# Altium PCB PowerSupplyV2.PcbDoc (part 1 of 4)
Units mm, origin at the board's own origin, x right, y up, seen from the top; angles counter-clockwise.
Board outline 28.17 x 37.01 mm, 2 copper layers (Top Layer, Bottom Layer), stack 0.971 mm thick; 117 components, 81 nets, 421 pads, 118 vias.
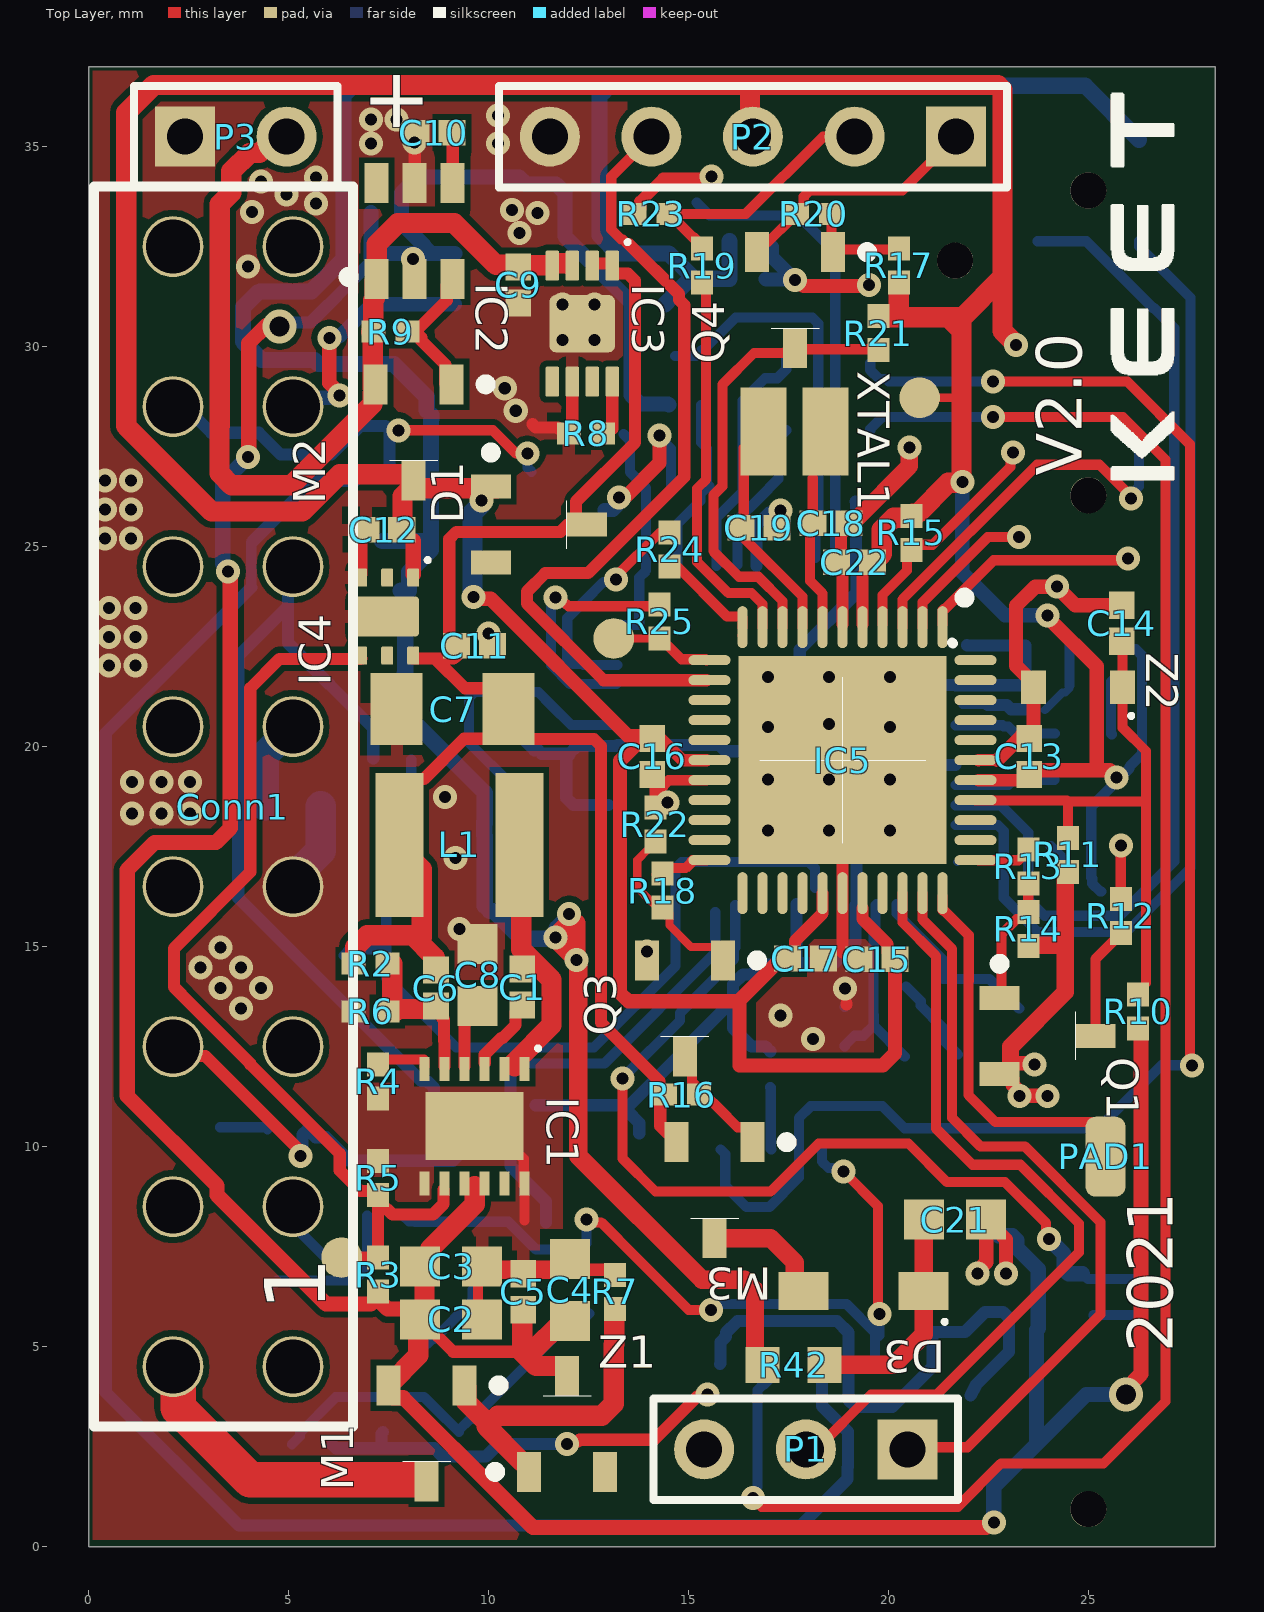
[diagram p0: Top Layer view]
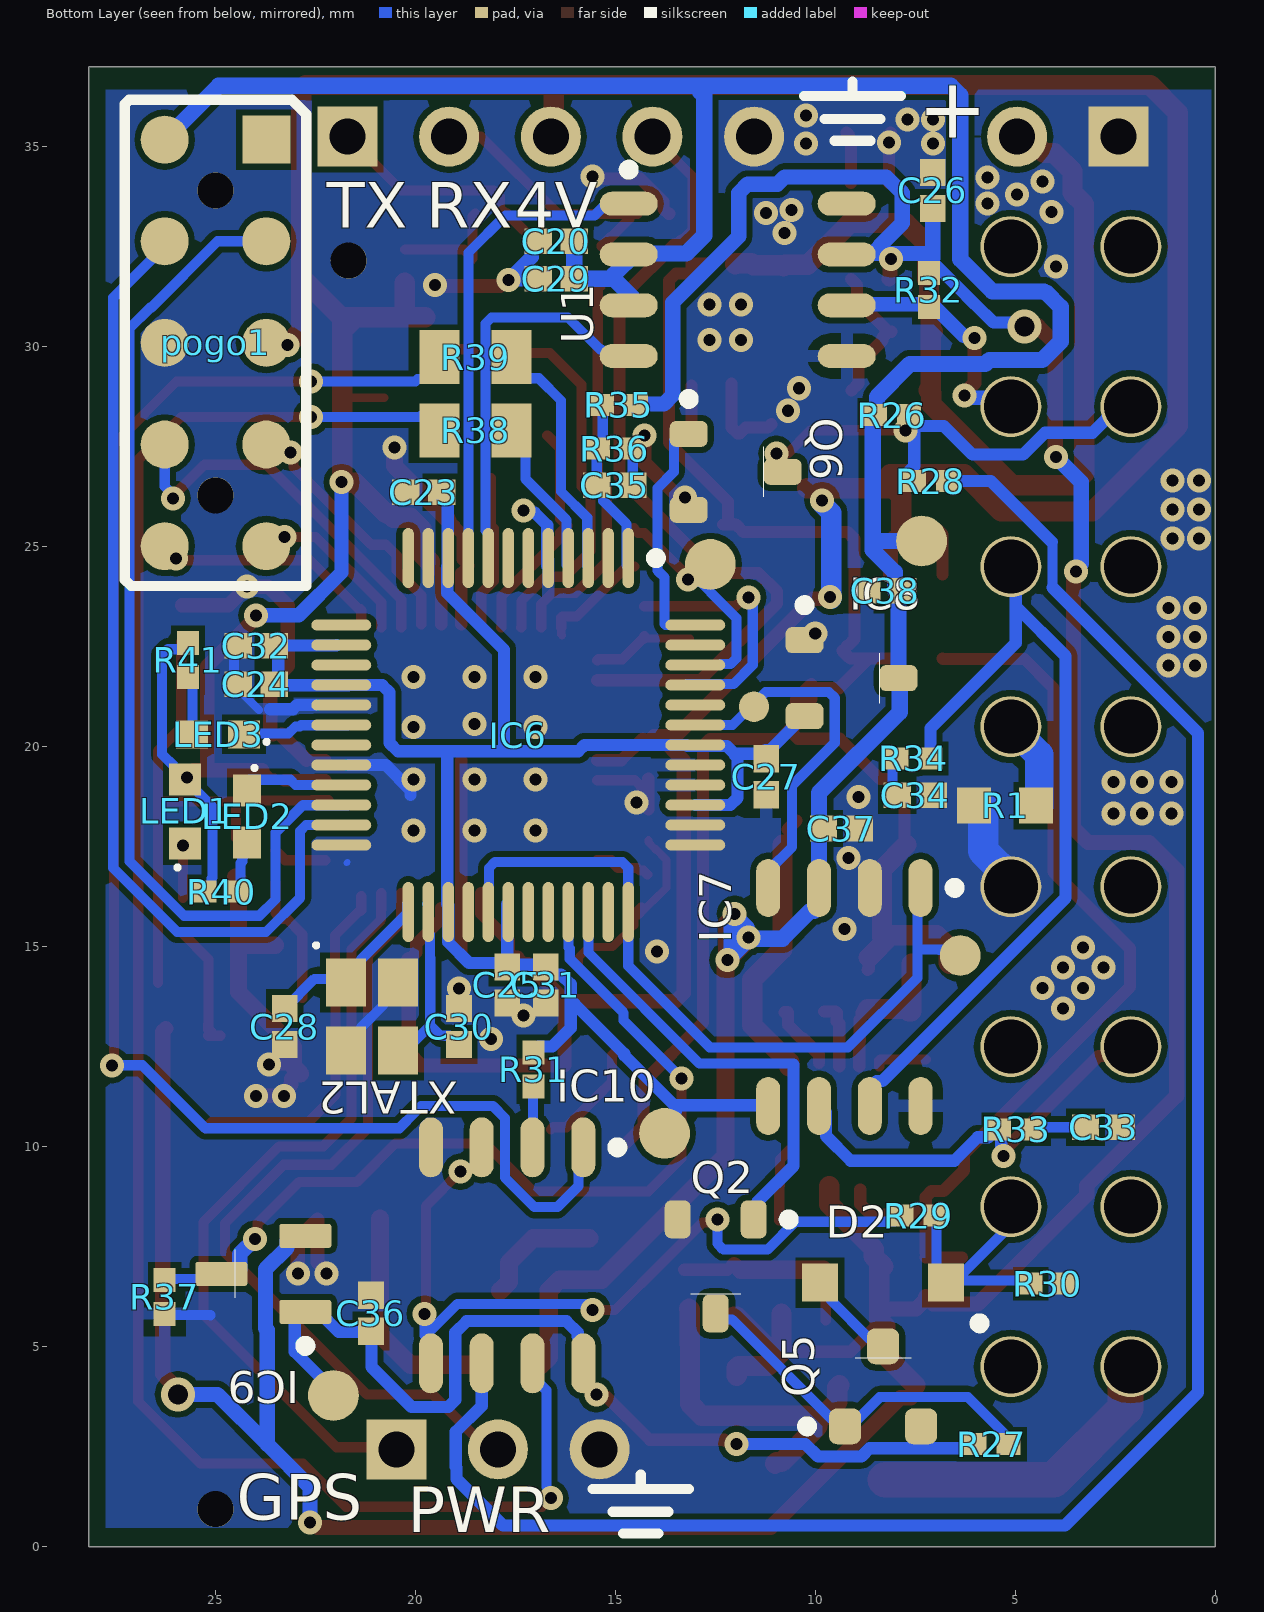
[diagram p1: Bottom Layer view, seen from below]

## Layer stack, top to bottom
Top Solder: solder mask 0.0102, Solder Resist, Dk 3.5
Top Layer: signal copper 0.0356
Dielectric 1: dielectric 0.9, FR-4, Dk 4.8
Bottom Layer: signal copper 0.0356
Bottom Solder: solder mask 0.0102, Solder Resist, Dk 3.5

## Board outline
0,0 28.169,0 28.169,37.008 0,37.008

## Design rules (kind name [scope] priority, off if disabled: settings)
Clearance [All] p1: gap=0.152 ignorepadtopadclearanceinfootprint=FALSE
PolygonConnect [All] p1: connectstyle=Relief reliefconductorwidth=0.305 reliefentries=4 polygonreliefangle="90 Angle" airgapwidth=0.254
RoomDefinition OBD [InComponentClass('OBD')] p1 off: confinementstyle=ConfineIn formatcopy=TRUE lockcomponents=FALSE outline 33.116,39.7 110.916,39.7 110.916,21.463 33.116,21.463
RoomDefinition Control [InComponentClass('Control')] p2 off: confinementstyle=ConfineIn formatcopy=TRUE lockcomponents=FALSE outline 31.242,1.397 62.255,1.397 62.255,12.573 31.242,12.573
RoomDefinition PowerSupply [InComponentClass('PowerSupply')] p3 off: confinementstyle=ConfineIn formatcopy=TRUE lockcomponents=FALSE outline 40.936,-25.4 190.161,-25.4 190.161,76.073 40.936,76.073
RoutingVias [All] p1: holewidth=0.3 width=0.6 viastyle="Through Hole" minholewidth=0.3 minwidth=0.6 maxholewidth=0.711 maxwidth=1.27
SolderMaskExpansion [All] p1: expansion=0.102 istentingtop=FALSE
Width [All] p1: maxlimit=1 minlimit=0.152 preferedwidth=0.254
30 further rules are at their usual default settings.

## Classes and differential pairs
component class OBD: C20 C23 C24 C25 C26 C27 C28 C29 C30 C31 C32 C33 C34 C35 C36 C37 C38 D2 IC6 IC7 IC8 IC9 IC10 LED2 LED3 pogo1 Q2 Q5 Q6 R26 R27 R28 R29 R30 R31 R32 R33 R34 R35 R36 R37 R38 R39 R40 R41 U1 U2 XTAL2
component class Control: C13 C14 C15 C16 C17 C18 C19 C21 C22 D3 IC5 LED1 M3 PAD1 Q1 Q3 Q4 R10 R11 R12 R13 R14 R15 R16 R17 R18 R19 R20 R21 R22 R23 R24 R25 R42 XTAL1 Z2
component class PowerSupply: C1 C2 C3 C4 C5 C6 C7 C8 C9 C10 C11 C12 Conn1 D1 IC1 IC2 IC3 IC4 L1 M1 M2 P1 P2 P3 R1 R2 R3 R4 R5 R6 R7 R8 R9 Z1

## Components (designator, comment, footprint, x,y, rotation, side; value= is the part's Value field where it differs from the comment)
C1 "100n" CAPC1005X06N 10.846,13.995 r90 top
C2 "4.7u" CAPC1608X10N 9.068,5.69 r180 top
C3 "4.7u" CAPC1608X10N 9.068,7.01 r0 top
C4 "4.7u" CAPC1608X10N 12.031,6.426 r270 top
C5 "100n" CAPC1005X06N 10.871,6.375 r270 top
C6 "51p" CAPC1005X06N 8.687,13.97 r90 top
C7 "47u" CAPC3216X12N 9.102,20.941 r0 top
C8 "2.2u" CAPC1608X10N 9.728,14.3 r270 top
C9 "4.7u" CAPC1005X06N 10.744,31.547 r90 top
C10 "4.7n" CAPC1005X06N 8.636,35.357 r0 top
C11 "1u" CAPC1005X06N 9.652,22.53 r0 top
C12 "2.2u" CAPC1005X06N 7.381,25.425 r180 top
C13 "1u" CAPC1005X06N 23.52,19.761 r90 top
C14 "1u" CAPC1005X06N 25.832,23.089 r90 top
C15 "1u" CAPC1005X06N 19.711,14.693 r180 top
C16 "1u" CAPC1005X06N 14.097,19.761 r90 top
C17 "1u" CAPC1005X06N 17.925,14.708 r0 top
C18 "8p" CAPC1005X06N 18.565,25.593 r180 top
C19 "8p" CAPC1005X06N 16.762,25.473 r180 top
C20 "100n" CAPC1005X06N 16.477,32.639 r180 bottom
C21 "10u" CAPC1608X10N 21.666,8.179 r180 top
C22 "1u" CAPC1005X06N 19.152,24.613 r0 top
C23 "1u" CAPC1005X06N 19.787,26.365 r0 bottom
C24 "1u" CAPC1005X06N 23.978,21.565 r0 bottom
C25 "1u" CAPC1005X06N 17.704,14.046 r270 bottom
C26 "100n" CAPC1005X06N 7.061,33.909 r270 bottom
C27 "1u" CAPC1005X06N 11.227,19.253 r270 bottom
C28 "10p" CAPC1005X06N 23.266,13.005 r90 bottom
C29 "10u" CAPC1005X06N 16.477,31.699 r180 bottom
C30 "10p" CAPC1005X06N 18.907,13.005 r270 bottom
C31 "1u" CAPC1005X06N 16.739,14.046 r270 bottom
C32 "1u" CAPC1005X06N 23.978,22.53 r180 bottom
C33 "560p" CAPC1005X06N 2.794,10.49 r180 bottom
C34 "560p" CAPC1005X06N 7.501,18.786 r180 bottom
C35 "100n" CAPC1005X06N 15.011,26.543 r0 bottom
C36 "100n" CAPC1005X06N 21.107,5.842 r270 bottom
C37 "100n" CAPC1005X06N 9.347,17.958 r0 bottom
C38 "1u" CAPC1005X06N 8.255,23.901 r0 bottom
Conn1 "OBD2 connector" OBD2 2.112,4.506 r90 top locked
D1 "schottky 0.35V @10mA" SOT95P245X110-3N 11.257,25.558 r0 top
D2 "Schottky" TSSOP0P370X135-2N 8.306,6.604 r0 bottom
D3 "02SSL20L" SODFL370X100-2N 19.38,6.401 r180 top
IC1 "DC/DC" SON50P300X80_HS-13N 9.652,10.516 r270 top
IC2 "S-1011EA0-M6T1U4" SOT95P245X110-6N 8.153,32.893 r90 top
IC3 "battery manager" PSON50P300X100_HS-9N 12.344,30.579 r270 top
IC4 "LDO SON-PKG" SON65P200X80_HS-7N 7.468,23.258 r270 top
IC5 "atmega 1284p-mu" QFN50P700X700X100_HS-45N 18.85,19.666 r270 top locked
IC6 "ARM" TSQFP50P898X898X160-48N 17.424,20.295 r270 bottom locked
IC7 "CAN driver" SOP127P600X175-8N 9.271,13.749 r270 bottom
IC8 "LDO 3.3V" SOT95P240X135-3N 9.093,21.717 r180 bottom
IC9 "5V" SOT95P237X111-3N-ver2 23.799,6.824 r0 bottom
IC10 "Comparator" SOIC127P600X175-8N 17.704,7.288 r270 bottom
L1 "4.7u" INDC4040X19N 9.271,17.551 r180 top
LED1 "red" CAC-0P80X160-2N 25.756,18.39 r90 bottom locked
LED2 "red" CAC-0P80X160-2N_ver2 24.206,18.262 r270 bottom
LED3 "Yellow" CAC-0P80X160-2N_ver2 24.93,20.314 r0 bottom
M1 "Pmos enhancement" SOT95P245X110-3N 8.451,2.837 r270 top
M2 "Pmos" SOT95P245X110-3N 8.129,27.864 r270 top
M3 "Pmos" SOT95P245X110-3N 15.654,8.916 r270 top
P1 "Header 3" HDR1X3 20.472,2.438 r180 top locked
P2 "Header 5" HDR1X5 21.692,35.255 r180 top locked
P3 "Header 2" HDR1X2 2.413,35.255 r0 top
PAD1 "DEBTX" PAD 25.425,9.754 r90 top
pogo1 "POGO-connector3x4" POGO_connector_3x4 23.724,35.179 r180 bottom locked
Q1 "BJT" SOT95P245X110-3N 23.978,12.776 r0 top
Q2 "Nmos" SOT95P240X135-3N 12.489,7.01 r270 bottom
Q3 "BJT" SOT95P245X110-3N 14.91,13.462 r270 top
Q4 "BJT" SOT95P245X110-3N 17.665,31.169 r270 top
Q5 "Pmos" SOT95P237X111-3N 8.306,4.013 r90 bottom
Q6 "Nmos" SOT95P240X135-3N 11.989,26.873 r180 bottom
R1 "0" RESC1608X04N 5.253,18.53 r0 bottom
R2 "88.7K" RESC1005X04N 7.045,14.58 r180 top
R3 "6.8M" RESC1005X04N 7.239,6.807 r270 top
R4 "18.7K" RESC1005X04N 7.239,11.633 r90 top
R5 "1.3M" RESC1005X04N 7.239,9.22 r270 top
R6 "22.1K" RESC1005X04N 7.045,13.386 r0 top
R7 "10K" RESC1005X04N 13.157,6.375 r270 top
R8 "18K" RESC1005X04N 12.434,27.837 r0 top
R9 "100K" RESC1005X04N 7.544,30.378 r0 top
R10 "120K" RESC1005X04N 26.238,13.386 r90 top
R11 "39K" RESC1005X04N 24.486,17.297 r270 top
R12 "150" RESC1005X04N 25.806,15.773 r90 top
R13 "4.7k" RESC1005X04N 23.495,17.012 r270 top
R14 "47k" RESC1005X04N 23.495,15.443 r90 top
R15 "10K" RESC1005X04N 20.574,25.349 r270 top
R16 "47k" RESC1005X04N 14.834,11.303 r180 top
R17 "4.7k" RESC1005X04N 20.259,32.032 r270 top
R18 "4.7k" RESC1005X04N 14.351,16.408 r270 top
R19 "2.4k" RESC1005X04N 15.342,32.029 r270 top
R20 "47k" RESC1005X04N 18.136,33.325 r0 top
R21 "4.7k" RESC1005X04N 19.748,30.341 r90 top
R22 "47k" RESC1005X04N 14.173,18.064 r270 top
R23 "5.6k" RESC1005X04N 14.072,33.325 r0 top
R24 "2.2k" RESC1005X04N 14.526,24.934 r270 top
R25 "2.2k" RESC1005X04N 14.275,23.139 r270 top
R26 "3.3k" RESC1005X04N 8.077,28.296 r0 bottom
R27 "3.3k" RESC1005X04N 5.588,2.565 r0 bottom
R28 "10k" RESC1005X04N 7.112,26.645 r180 bottom
R29 "10k" RESC1005X04N 7.417,8.28 r0 bottom
R30 "10k" RESC1005X04N 4.191,6.579 r0 bottom
R31 "10k" RESC1005X04N 17.043,11.938 r270 bottom
R32 "510" RESC1005X04N 7.157,31.427 r90 bottom
R33 "100" RESC1005X04N 4.978,10.439 r0 bottom
R34 "100" RESC1005X04N 7.544,19.71 r180 bottom
R35 "47k" RESC1005X04N 14.91,28.55 r180 bottom
R36 "10k" RESC1005X04N 15.011,27.457 r0 bottom
R37 "10k" RESC1005X04N 26.264,6.248 r90 bottom
R38 "0" RESC2012X06N 18.491,27.915 r180 bottom
R39 "0" RESC2012X06N 18.491,29.743 r180 bottom
R40 "330" RESC1005X04N 24.841,16.383 r180 bottom
R41 "330" RESC1005X04N 25.679,22.166 r270 bottom
R42 "0" RESC1608X04N 17.628,4.55 r180 top
U1 "Lin transceiver (K line)" SOP127P600X175-8N 11.938,31.674 r180 bottom
XTAL1 "16MHz" DFN145P200X80-2N 17.653,27.889 r0 top
XTAL2 "12MHz" DFN170P250X60-4N 21.082,13.259 r270 bottom
Z1 "zener 10V" SOT95P245X110-3N 11.963,3.073 r90 top
Z2 "zener 3.9V" SODFL250X100-2N 24.74,21.488 r180 top

## Footprints (in the part's own frame and the unit in brackets; to place one, negate y for a bottom-side part, rotate by r counter-clockwise, add the part's x,y. Pads: shape width x height; smd on the part's side, far side on the other; paste and mask are expansions set on the pad)
CAC-0P80X160-2N [mm] "Chip Array, Concave, 2-Leads, Pitch 0,00mm,  Body 0,80x1,60mm,  IPC Medium Density"
  rect 0.8x0.8 smd: 1(-0.8,0) 2(0.8,0)
  silkscreen extent -1.46,0.14 -1.35,0.24, body extent -0.9,-0.45 0.9,0.45, height 0.8
CAC-0P80X160-2N_ver2 [mm] "Chip Array, Concave, 2-Leads, Pitch 0,00mm,  Body 0,80x1,60mm,  IPC Medium Density"
  rect 0.8x0.7 smd: 1(-0.65,0) 2(0.65,0)
  silkscreen extent -1.26,0.14 -1.16,0.24, body extent -0.85,-0.4 0.85,0.4, height 0.8
CAPC1005X06N [mm] "Chip Capacitor, 0402, 2-Leads, Body 1,02x0,50mm, IPC Medium Density"
  rect 0.68x0.64 smd: 1(-0.45,0) 2(0.45,0)
  body extent -0.55,-0.3 0.55,0.3, height 0.6
CAPC1608X10N [mm] "capacitor, 0603"
  rect 1x1 smd: 1(-0.775,0) 2(0.775,0)
  body extent -0.87,-0.48 0.87,0.48, height 0.95
CAPC3216X12N [mm] "Chip Capacitor, 1206, 2-Leads, Body 3,20x1,60mm, IPC Medium Density"
  rect 1.3x1.8 smd: 1(-1.4,0) 2(1.4,0)
  body extent -1.7,-0.9 1.7,0.9, height 1.25
DFN145P200X80-2N [mm] "DFN, 2-Leads, Body 2,50x2,00mm, Pitch 1,45mm, IPC Medium Density"
  rect 1.15x2.2 smd: 1(-0.775,0) 2(0.775,0)
  body extent -1.15,-1.3 1.15,1.3, height 0.8
DFN170P250X60-4N [mm] "DFN, 4-Leads, Body 2,00x2,50mm, Pitch 1,70mm, IPC Medium Density"
  rect 1.2x1 smd: 1(-0.85,-0.65) 2(0.85,-0.65) 3(0.85,0.65) 4(-0.85,0.65)
  silkscreen extent -1.83,-1.45 -1.73,-1.35, body extent -1.3,-1.08 1.3,1.07, height 0.6
HDR1X2 [mm] "Connector; Header; 2 Position"
  rect 1.5x1.5 hole 0.9: 1(0,0)
  round 1.5 hole 0.9: 2(2.54,0)
  silkscreen extent -1.27,-1.27 3.81,1.27
HDR1X3 [mm] "Connector; Header; 3 Position"
  rect 1.5x1.5 hole 0.9: 1(0,0)
  round 1.5 hole 0.9: 2(2.54,0) 3(5.08,0)
  silkscreen extent -1.27,-1.27 6.35,1.27
HDR1X5 [mm] "Connector; Header; 5 Position"
  rect 1.5x1.5 hole 0.9: 1(0,0)
  round 1.5 hole 0.9: 2(2.54,0) 3(5.08,0) 4(7.62,0) 5(10.16,0)
  silkscreen extent -1.27,-1.27 11.43,1.27
INDC4040X19N [mm] "Chip Inductor, 2-Leads, Body 4,00x4,00mm, IPC Medium Density"
  rect 1.2x3.6 smd: 1(-1.5,0) 2(1.5,0)
  body extent -2.1,-2.1 2.1,2.1, height 1.9
OBD2 [mm]
  round 1.524 hole 1.35: 1(0,-3) 2(4,-3) 3(8,-3) 4(12,-3) 5(16,-3) 6(20,-3) 7(24,-3) 8(28,-3) 9(28,0) 10(24,0) 11(20,0) 12(16,0) 13(12,0) 14(8,0) 15(4,0) 16(0,0)
  silkscreen extent -1.5,-4.5 29.5,1.97, body extent -6.51,-3.44 34.66,22.37, height 16.71
PAD [mm]
  rrect50% 2x1 smd: 1(0,0)
POGO_connector_3x4 [mm]
  rect 1.2x1.2 smd: 1(0,0)
  round 1.2 smd: 2(-2.54,0) 3(-2.54,-2.54) 4(0,-2.54) 5(0,-5.08) 6(-2.54,-5.08) 7(0,-7.62) 8(-2.54,-7.62) 9(0,-10.16) 10(-2.54,-10.16)
  silkscreen extent -3.54,-11.16 1,1
PSON50P300X100_HS-9N [mm] "PSON, 8-Leads, Body 2,00x3,00mm, Pitch 0,50mm, Thermal Pad 1,63x1,43mm, IPC Medium Density"
  rrect20% 0.75x0.34 smd: 1(-1.45,0.75) 2(-1.45,0.25) 3(-1.45,-0.25) 4(-1.45,-0.75) 5(1.45,-0.75) 6(1.45,-0.25) 7(1.45,0.25) 8(1.45,0.75)
  rrect20% 1.43x1.63 smd: 9(0,0)
  silkscreen extent -2.09,1.08 -1.99,1.18, body extent -1.5,-1 1.5,1, height 1
QFN50P700X700X100_HS-45N [mm] "QFN, 44-Leads, Body 7,00x7,00mm, Pitch 0,50mm, Thermal Pad 5,20x5,20mm, IPC Medium Density"
  oval 1.05x0.25 smd: 1(-3.325,2.5) 2(-3.325,2) 3(-3.325,1.5) 4(-3.325,1) 5(-3.325,0.5) 6(-3.325,0) 7(-3.325,-0.5) 8(-3.325,-1) 9(-3.325,-1.5) 10(-3.325,-2) 11(-3.325,-2.5) 23(3.325,-2.5) 24(3.325,-2) 25(3.325,-1.5) 26(3.325,-1) 27(3.325,-0.5) 28(3.325,0) 29(3.325,0.5) 30(3.325,1) 31(3.325,1.5) 32(3.325,2) 33(3.325,2.5)
  oval 0.25x1.05 smd: 12(-2.5,-3.325) 13(-2,-3.325) 14(-1.5,-3.325) 15(-1,-3.325) 16(-0.5,-3.325) 17(0,-3.325) 18(0.5,-3.325) 19(1,-3.325) 20(1.5,-3.325) 21(2,-3.325) 22(2.5,-3.325) 34(2.5,3.325) 35(2,3.325) 36(1.5,3.325) 37(1,3.325) 38(0.5,3.325) 39(0,3.325) 40(-0.5,3.325) 41(-1,3.325) 42(-1.5,3.325) 43(-2,3.325) 44(-2.5,3.325)
  rect 5.2x5.2 smd: 45(0,0)
  silkscreen extent -4.19,-2.07 2.07,3.17, body extent -3.57,-3.57 3.57,3.57, height 1
RESC1005X04N [mm] "Chip Resistor, 0402, 2-Leads, Body 1,00x0,50mm, IPC Medium Density"
  rect 0.6x0.55 smd: 1(-0.425,0) 2(0.425,0)
  body extent -0.53,-0.28 0.53,0.28, height 0.37
RESC1608X04N [mm] "Chip Resistor, 0603, 2-Leads, Body 1,60x0,80mm, IPC Medium Density"
  rect 0.85x0.9 smd: 1(-0.775,0) 2(0.775,0)
  body extent -0.85,-0.45 0.85,0.45, height 0.4
RESC2012X06N [mm] "Chip Resistor, 0805, 2-Leads, Body 2,00x1,25mm, IPC Medium Density"
  rect 1x1.35 smd: 1(-0.9,0) 2(0.9,0)
  body extent -1.05,-0.67 1.05,0.67, height 0.6
SODFL250X100-2N [mm] "SODFL, 2-Leads, Body 1,25x2,50mm, IPC Medium Density"
  rect 0.63x0.83 smd: 1(-1.112,0) 2(1.112,0)
  silkscreen extent -1.38,0.67 -1.28,0.76, body extent -1.25,-0.67 1.25,0.67, height 1
SODFL370X100-2N [mm] "SODFL, 2-Leads, Body 1,85x3,70mm, IPC Medium Density"
  rect 1.25x0.95 smd: 1(-1.5,0) 2(1.5,0)
  silkscreen extent -2.07,0.73 -1.98,0.82, body extent -1.85,-0.97 1.85,0.98, height 1
SOIC127P600X175-8N [mm] "SOIC, 8-Leads, Body 4,90x3,90mm, Pitch 1,27mm, IPC Medium Density"
  oval 1.5x0.6 smd: 1(-2.7,1.905) 2(-2.7,0.635) 3(-2.7,-0.635) 4(-2.7,-1.905) 5(2.7,-1.905) 6(2.7,-0.635) 7(2.7,0.635) 8(2.7,1.905)
  silkscreen extent -2.82,2.63 -2.58,2.88, body extent -3,-2.45 3,2.45, height 1.75
SON50P300X80_HS-13N [mm] "SON, 12-Leads, Body 3,00x3,00mm, Pitch 0,50mm, Thermal Pad 2,45x1,70mm, IPC Medium Density"
  rect 0.6x0.25 smd: 1(-1.435,1.25) 2(-1.435,0.75) 3(-1.435,0.25) 4(-1.435,-0.25) 5(-1.435,-0.75) 6(-1.435,-1.25) 7(1.435,-1.25) 8(1.435,-0.75) 9(1.435,-0.25) 10(1.435,0.25) 11(1.435,0.75) 12(1.435,1.25)
  rect 1.7x2.45 smd: 13(0,0)
  silkscreen extent -2,1.54 -1.9,1.64, body extent -1.55,-1.55 1.55,1.55, height 0.8
SON65P200X80_HS-7N [mm] "SON, 6-Leads, Body 2,00x2,00mm, Pitch 0,65mm, Thermal Pad 2,45x1,70mm, IPC Medium Density"
  rrect20% 0.45x0.3 smd: 1(-0.975,0.65) 2(-0.975,0) 3(-0.975,-0.65) 4(0.975,-0.65) 5(0.975,0) 6(0.975,0.65)
  rrect20% 1x1.6 smd: 7(0,0)
  silkscreen extent -1.46,0.96 -1.36,1.06, body extent -1.05,-1.05 1.05,1.05, height 0.8
SOP127P600X175-8N [mm] "SOP, 8-Leads, Body 4,90x3,90mm, Pitch 1,27mm, IPC Medium Density"
  oval 1.45x0.6 smd: 1(-2.725,1.905) 2(-2.725,0.635) 3(-2.725,-0.635) 4(-2.725,-1.905) 5(2.725,-1.905) 6(2.725,-0.635) 7(2.725,0.635) 8(2.725,1.905)
  silkscreen extent -2.85,2.63 -2.6,2.88, body extent -3,-2.5 3,2.5, height 1.75
SOT95P237X111-3N [mm] "SOT23, 3-Leads, Body 2,90x2,37mm, Pitch 0,95mm, IPC Medium Density"
  rrect50% 0.9x0.8 smd: 1(-1,0.95) 2(-1,-0.95) 3(1,0)
  silkscreen extent -1.12,-0.7 0.7,2.03, body extent -1.32,-1.5 1.32,1.5, height 1.11
SOT95P237X111-3N-ver2 [mm] "SOT23, 3-Leads, Body 2,90x2,37mm, Pitch 0,95mm, IPC Medium Density"
  rrect20% 1.3x0.6 smd: 1(-1.05,0.95) 2(-1.05,-0.95) 3(1.05,0)
  silkscreen extent -1.17,-0.6 0.7,1.92, body extent -1.32,-1.5 1.32,1.5, height 1.11
SOT95P240X135-3N [mm] "SOT23, 3-Leads, Body 2,90x2,40mm, Pitch 0,95mm, IPC Medium Density"
  rrect50% 0.95x0.65 smd: 1(-1.175,0.95) 2(-1.175,-0.95) 3(1.175,0)
  silkscreen extent -1.3,-0.63 0.7,1.95, body extent -1.25,-1.5 1.25,1.5, height 1.35
SOT95P245X110-3N [mm] "SOT23, 3-Leads, Body 2,90x2,45mm, Pitch 0,95mm, IPC Medium Density"
  rect 1x0.6 smd: 1(-1.2,0.95) 2(-1.2,-0.95) 3(1.2,0)
  silkscreen extent -1.32,-0.6 0.7,1.92, body extent -1.3,-1.5 1.3,1.5, height 1.1
SOT95P245X110-6N [mm] "SOT23, 6-Leads, Body 2,90x2,45mm, Pitch 0,95mm, IPC Medium Density"
  rect 1x0.6 smd: 1(-1.2,0.95) 2(-1.2,0) 3(-1.2,-0.95) 4(1.2,-0.95) 5(1.2,0) 6(1.2,0.95)
  silkscreen extent -1.27,1.53 -1.02,1.78, body extent -1.3,-1.5 1.3,1.5, height 1.1
TSQFP50P898X898X160-48N [mm] "TSQFP, 48-Leads, Body 7,00x7,00mm, Pitch 0,50mm, IPC Medium Density"
  oval 1.5x0.28 smd: 1(-4.425,2.75) 2(-4.425,2.25) 3(-4.425,1.75) 4(-4.425,1.25) 5(-4.425,0.75) 6(-4.425,0.25) 7(-4.425,-0.25) 8(-4.425,-0.75) 9(-4.425,-1.25) 10(-4.425,-1.75) 11(-4.425,-2.25) 12(-4.425,-2.75) 25(4.425,-2.75) 26(4.425,-2.25) 27(4.425,-1.75) 28(4.425,-1.25) 29(4.425,-0.75) 30(4.425,-0.25) 31(4.425,0.25) 32(4.425,0.75) 33(4.425,1.25) 34(4.425,1.75) 35(4.425,2.25) 36(4.425,2.75)
  oval 0.28x1.5 smd: 13(-2.75,-4.425) 14(-2.25,-4.425) 15(-1.75,-4.425) 16(-1.25,-4.425) 17(-0.75,-4.425) 18(-0.25,-4.425) 19(0.25,-4.425) 20(0.75,-4.425) 21(1.25,-4.425) 22(1.75,-4.425) 23(2.25,-4.425) 24(2.75,-4.425) 37(2.75,4.425) 38(2.25,4.425) 39(1.75,4.425) 40(1.25,4.425) 41(0.75,4.425) 42(0.25,4.425) 43(-0.25,4.425) 44(-0.75,4.425) 45(-1.25,4.425) 46(-1.75,4.425) 47(-2.25,4.425) 48(-2.75,4.425)
  silkscreen extent -4.55,3.31 -4.3,3.56, body extent -4.49,-4.49 4.49,4.49, height 1.6
TSSOP0P370X135-2N [mm] "TSSOP, 2-Leads, Body 1,55x2,70mm, Pitch 0,00mm, IPC Medium Density"
  rect 0.9x0.95 smd: 1(1.575,0) 2(-1.575,0)
  silkscreen extent -2.54,0.89 -2.29,1.14, body extent -1.85,-0.85 1.85,0.85, height 1.35

## Part data
C1 C35 C36: library part GRM155R71C104KA88D, "CAP CER 0.1UF 16V X7R 0402", Capacitance=100nF, Case Code (Imperial)=0402, Case Code (Metric)=1005, Dielectric=X7R, Dielectric Material=Ceramic, Insulation Resistance=10GR, Manufacturer=Murata, Max Operating Temperature=125°C, Min Operating Temperature=-55°C, Package Quantity=1, Supplier Part Number 1=81-GRM155R71C104KA88, Tolerance=10%, Voltage=16V, Case/Package=0402, Category="Ceramic Capacitors", ComponentLink1Description=https://datasheet.ciiva.com/18102/getdatasheetpartid-85307-18102905.pdf?src-supplier=Verical, ComponentLink1URL=https://datasheet.ciiva.com/18102/getdatasheetpartid-85307-18102905.pdf?src-supplier=Verical, ComponentLink2Description=https://datasheet.ciiva.com/129/grm155r71c104ka88-01-129739.pdf?src-supplier=Digi-Key, ComponentLink2URL=https://datasheet.ciiva.com/129/grm155r71c104ka88-01-129739.pdf?src-supplier=Digi-Key, ComponentLink3Description=https://datasheet.ciiva.com/129/grm155r71c104ka88-01-129740.pdf?src-supplier=Digi-Key, ComponentLink3URL=https://datasheet.ciiva.com/129/grm155r71c104ka88-01-129740.pdf?src-supplier=Digi-Key, ComponentLink4Description=https://datasheet.ciiva.com/29199/454098-da-01-en-vs-kondensator-0402-29199799.pdf?src-supplier=Conrad, ComponentLink4URL=https://datasheet.ciiva.com/29199/454098-da-01-en-vs-kondensator-0402-29199799.pdf?src-supplier=Conrad, ComponentLink5Description=https://datasheet.ciiva.com/28534/4360-28534133.pdf?src-supplier=Element14, ComponentLink5URL=https://datasheet.ciiva.com/28534/4360-28534133.pdf?src-supplier=Element14, ComponentLink6Description=https://datasheet.ciiva.com/14103/grmseries-highdielectrictype-eng-14103750.pdf?src-supplier=Distrelec, ComponentLink6URL=https://datasheet.ciiva.com/14103/grmseries-highdielectrictype-eng-14103750.pdf?src-supplier=Distrelec, ComponentLink7Description=https://datasheet.ciiva.com/16199/product-16199000.pdf?src-supplier=Future+Electronics, ComponentLink7URL=https://datasheet.ciiva.com/16199/product-16199000.pdf?src-supplier=Future+Electronics, ComponentLink8Description=https://datasheet.ciiva.com/14116/grmseries-highdielectrictype-eng-14116878.pdf?src-supplier=Distrelec, ComponentLink8URL=https://datasheet.ciiva.com/14116/grmseries-highdielectrictype-eng-14116878.pdf?src-supplier=Distrelec, ComponentLink9Description=https://datasheet.ciiva.com/7937/4360-7937615.pdf?src-supplier=Element14, ComponentLink9URL=https://datasheet.ciiva.com/7937/4360-7937615.pdf?src-supplier=Element14, ComponentLink10Description=https://datasheet.ciiva.com/28534/4360-28534127.pdf?src-supplier=Element14, ComponentLink10URL=https://datasheet.ciiva.com/28534/4360-28534127.pdf?src-supplier=Element14, Depth=0.5mm, Height=0.5mm, Lead Free="Lead Free", Length=1mm, Manufacturer Part Number=GRM155R71C104KA88D, Material=Ceramic, Mount="Surface Mount", Number of Pins=2, Packaging="Tape and Reel", Pricing 1="1=0,10000, 10=0,01200, 50=0,01200, 100=0,01000, 1000=0,00600, 10000=0,00300 (USD)", Radiation Hardening=No, REACH SVHC="No SVHC", RoHS=Yes, RoHS Compliant=Yes, Stock 1=8059685, Supplier 1=Mouser, Termination=SMD/SMT, Thickness=0.022inch, Voltage Rating=16V, Voltage Rating (DC)=16V, Width=0.5mm
C2 C3 C4: library part TMK107BBJ475MA-T, "Cap Ceramic 4.7uF 25V X5R 20% SMD 0603 85°C Paper T/R", Capacitance=4.7uF, Case/Package=0603, Manufacturer="Taiyo Yuden", Max Operating Temperature=85°C, Min Operating Temperature=-55°C, Supplier Part Number 1=963-TMK107BBJ475MA-T, Tolerance=20%, Voltage Rating=25V, Category="Ceramic Capacitors", ComponentLink1Description="https://ds.yuden.co.jp/TYCOMPAS/ut/detail?pn=TMK107BBJ475MA-T &amp;u=M&src-supplier=Digi-Key", ComponentLink1URL="https://ds.yuden.co.jp/TYCOMPAS/ut/detail?pn=TMK107BBJ475MA-T &amp;u=M&src-supplier=Digi-Key", Manufacturer Part Number=TMK107BBJ475MA-T, Mount="Surface Mount", Packaging="Tape and Reel", Pricing 1="1=0,35000, 10=0,15700, 50=0,15700, 100=0,10600, 1000=0,08200, 10000=0,06300 (USD)", RoHS=Yes, RoHS Compliant=Yes, Stock 1=24308, Supplier 1=Mouser
C5 C20 C26 C37: library part C1005X5R1H104K050BB, "CAP CER 0.1UF 50V X5R 0402", Capacitance=100nF, Case Code (Imperial)=0402, Case Code (Metric)=1005, Dielectric=X5R, Dielectric Material=Ceramic, Manufacturer=TDK, Max Operating Temperature=85°C, Min Operating Temperature=-55°C, Package Quantity=1, Supplier Part Number 1=810-C1005X5R1H104K, Tolerance=10%, Voltage=50V, Case/Package=0402, Category="Ceramic Capacitors", ComponentLink1Description=https://datasheet.ciiva.com/26946/getdatasheetpartid-743571-26946503.pdf?src-supplier=Verical, ComponentLink1URL=https://datasheet.ciiva.com/26946/getdatasheetpartid-743571-26946503.pdf?src-supplier=Verical, ComponentLink2Description=https://datasheet.ciiva.com/6292/tdkmlcccaprange-6292486.pdf?src-supplier=Digi-Key, ComponentLink2URL=https://datasheet.ciiva.com/6292/tdkmlcccaprange-6292486.pdf?src-supplier=Digi-Key, ComponentLink3Description=https://datasheet.ciiva.com/16494/e413-c-16494264.pdf?src-supplier=Future+Electronics, ComponentLink3URL=https://datasheet.ciiva.com/16494/e413-c-16494264.pdf?src-supplier=Future+Electronics, ComponentLink4Description=https://datasheet.ciiva.com/17487/e412-c-17487567.pdf?src-supplier=Avnet+Europe, ComponentLink4URL=https://datasheet.ciiva.com/17487/e412-c-17487567.pdf?src-supplier=Avnet+Europe, Construction=Flat, Depth=0.5mm, Height=0.5mm, Lead Free="Lead Free", Length=1mm, Manufacturer Part Number=C1005X5R1H104K050BB, Mount="Surface Mount", Packaging="Tape and Reel", Pricing 1="1=0,12000, 10=0,04700, 50=0,04700, 100=0,03200, 1000=0,02200, 10000=0,01400 (USD)", Radiation Hardening=No, REACH SVHC="No SVHC", Resistor Type=Ceramic, RoHS=Yes, RoHS Compliant=Yes, Series=C, Stock 1=364267, Supplier 1=Mouser, Termination=SMD/SMT, Thickness=0.022inch, Voltage Rating=50V, Voltage Rating (DC)=50V, Weight=2.3E-05oz, Width=0.02inch
C6: library part GRM1555C1H510JA01D, "CAP CER 51PF 50V C0G/NP0 0402", Capacitance=51pF, Case Code (Imperial)=0402, Case Code (Metric)=1005, Dielectric=C0G, Manufacturer=Murata, Max Operating Temperature=125°C, Min Operating Temperature=-55°C, Package Quantity=10000, Supplier Part Number 1=81-GRM1555C1H510JA1D, Tolerance=5%, Voltage=50V, Case/Package=0402, Category="Ceramic Capacitors", ComponentLink1Description=https://datasheet.ciiva.com/11606/product-11606259.pdf?src-supplier=Avnet, ComponentLink1URL=https://datasheet.ciiva.com/11606/product-11606259.pdf?src-supplier=Avnet, ComponentLink2Description=https://datasheet.ciiva.com/6263/grm1555c1h510ja01-01-6263865.pdf?src-supplier=Digi-Key, ComponentLink2URL=https://datasheet.ciiva.com/6263/grm1555c1h510ja01-01-6263865.pdf?src-supplier=Digi-Key, ComponentLink3Description=https://datasheet.ciiva.com/6263/partnumbering-e-01-6263868.pdf?src-supplier=Digi-Key, ComponentLink3URL=https://datasheet.ciiva.com/6263/partnumbering-e-01-6263868.pdf?src-supplier=Digi-Key, ComponentLink4Description=https://datasheet.ciiva.com/6263/partnumbering-e-01-6263870.pdf?src-supplier=Digi-Key, ComponentLink4URL=https://datasheet.ciiva.com/6263/partnumbering-e-01-6263870.pdf?src-supplier=Digi-Key, Depth=0.5mm, Height=0.5mm, Lead Free="Lead Free", Length=1mm, Manufacturer Part Number=GRM1555C1H510JA01D, Mount="Surface Mount", Packaging="Tape and Reel", Pricing 1="1=0,10000, 10=0,06000, 50=0,06000, 100=0,02600, 1000=0,01400, 10000=0,01100 (USD)", Radiation Hardening=No, RoHS=Yes, Stock 1=25277, Supplier 1=Mouser, Termination=SMD/SMT, Thickness=0.022inch, Voltage Rating=50V, Voltage Rating (DC)=50V, Width=0.02inch
C7: library part GRM31CR61A476KE15L, "Multilayer Ceramic Capacitors MLCC - SMD/SMT 1206 47uF 10Vdc X5R +/-10%", Capacitance=47uF, Case Code (Imperial)=1206, Case Code (Metric)=3216, Dielectric=X5R, Manufacturer=Murata, Max Operating Temperature=85°C, Min Operating Temperature=-55°C, Package Quantity=2000, Supplier Part Number 1=81-GRM31CR61A476KE5L, Tolerance=10%, Voltage=10V, Case/Package=1206, Category="Ceramic Capacitors", ComponentLink1Description=https://datasheet.ciiva.com/29536/grm31cr61a476ke15-01-29536840.pdf?src-supplier=Digi-Key, ComponentLink1URL=https://datasheet.ciiva.com/29536/grm31cr61a476ke15-01-29536840.pdf?src-supplier=Digi-Key, ComponentLink2Description=https://datasheet.ciiva.com/13337/product-13337807.pdf?src-supplier=Mouser, ComponentLink2URL=https://datasheet.ciiva.com/13337/product-13337807.pdf?src-supplier=Mouser, ComponentLink3Description=https://datasheet.ciiva.com/46445/1769893-46445004.pdf?src-supplier=Element14, ComponentLink3URL=https://datasheet.ciiva.com/46445/1769893-46445004.pdf?src-supplier=Element14, ComponentLink4Description=https://datasheet.ciiva.com/41860/partnumbering-e-01-41860758.pdf?src-supplier=Digi-Key, ComponentLink4URL=https://datasheet.ciiva.com/41860/partnumbering-e-01-41860758.pdf?src-supplier=Digi-Key, ComponentLink5Description=https://datasheet.ciiva.com/46445/1769893-46445005.pdf?src-supplier=Element14, ComponentLink5URL=https://datasheet.ciiva.com/46445/1769893-46445005.pdf?src-supplier=Element14, Depth=1.6mm, Height=1.6mm, Lead Free="Lead Free", Length=3.2mm, Manufacturer Part Number=GRM31CR61A476KE15L, Material=Ceramic, Mount="Surface Mount", Packaging="Tape and Reel", Pricing 1="1=0,67000, 10=0,40500, 50=0,40500, 100=0,35300, 1000=0,23900, 10000=0,19100 (USD)", REACH SVHC="No SVHC", RoHS=Yes, Stock 1=61980, Supplier 1=Mouser, Termination=SMD/SMT, Thickness=0.071inch, Voltage Rating=10V, Voltage Rating (DC)=10V, Width=1.6mm
C8: library part CL10A225KP8NNNC, "SAMSUNG ELECTRO-MECHANICS - CL10A225KP8NNNC - SMD Multilayer Ceramic Capacitor, 2.2 µF, 10 V, 0603 [1608 Metric], ± 10%, X5R, CL Series", Capacitance=2.2uF, Case Code (Imperial)=0603, Case Code (Metric)=1608, Dielectric=X5R, Manufacturer=Samsung, Max Operating Temperature=85°C, Min Operating Temperature=-55°C, Package Quantity=1, Supplier Part Number 1=187-CL10A225KP8NNNC, Tolerance=10%, Voltage=10V, Case/Package=0603, Category="Ceramic Capacitors", ComponentLink1Description=https://datasheet.ciiva.com/25799/cl10a225kp8nnnc-25799697.pdf?src-supplier=Digi-Key, ComponentLink1URL=https://datasheet.ciiva.com/25799/cl10a225kp8nnnc-25799697.pdf?src-supplier=Digi-Key, ComponentLink2Description=https://datasheet.ciiva.com/26838/getdatasheetpartid-358617-26838359.pdf?src-supplier=Verical, ComponentLink2URL=https://datasheet.ciiva.com/26838/getdatasheetpartid-358617-26838359.pdf?src-supplier=Verical, ComponentLink3Description=https://datasheet.ciiva.com/29198/457945-da-01-en-vs-kondensator-0603-29198592.pdf?src-supplier=Conrad, ComponentLink3URL=https://datasheet.ciiva.com/29198/457945-da-01-en-vs-kondensator-0603-29198592.pdf?src-supplier=Conrad, Construction=Flat, Depth=0.8mm, Height=0.8mm, Lead Free="Lead Free", Length=1.6mm, Manufacturer Part Number=CL10A225KP8NNNC, Material=Ceramic, Mount="Surface Mount", Packaging="Tape and Reel", Pricing 1="1=0,10000, 10=0,03100, 50=0,03100, 100=0,02500, 1000=0,01400, 10000=0,00900 (USD)", Radiation Hardening=No, RoHS=Yes, RoHS Compliant=Yes, Series=CL, Stock 1=629992, Supplier 1=Mouser, Thickness=0.035inch, Voltage Rating=10V, Voltage Rating (DC)=10V, Width=0.031inch
C9: library part GRM155R60J475ME87D, "MURATA - GRM155R60J475ME87D - SMD Multilayer Ceramic Capacitor, 4.7 µF, 6.3 V, 0402 [1005 Metric], ± 20%, X5R, GRM Series", Capacitance=4.7uF, Case Code (Imperial)=0402, Case Code (Metric)=1005, Dielectric=X5R, Manufacturer=Murata, Max Operating Temperature=85°C, Min Operating Temperature=-55°C, Package Quantity=1, Supplier Part Number 1=81-GRM155R60J475ME8D, Tolerance=20%, Voltage=6.3V, Case/Package=0402, Category="Ceramic Capacitors", ComponentLink1Description=https://datasheet.ciiva.com/3779/21116grm155r60j475me8723-3779229.pdf?src-supplier=Arrow+Electronics, ComponentLink1URL=https://datasheet.ciiva.com/3779/21116grm155r60j475me8723-3779229.pdf?src-supplier=Arrow+Electronics, ComponentLink2Description=https://datasheet.ciiva.com/136/partnumbering-e-01-136783.pdf?src-supplier=Digi-Key, ComponentLink2URL=https://datasheet.ciiva.com/136/partnumbering-e-01-136783.pdf?src-supplier=Digi-Key, ComponentLink3Description=https://datasheet.ciiva.com/136/partnumbering-e-01-136784.pdf?src-supplier=Digi-Key, ComponentLink3URL=https://datasheet.ciiva.com/136/partnumbering-e-01-136784.pdf?src-supplier=Digi-Key, Construction=Flat, Depth=0.5mm, Height=0.5mm, Lead Free="Lead Free", Length=1mm, Manufacturer Part Number=GRM155R60J475ME87D, Mount="Surface Mount", Packaging="Tape and Reel", Pricing 1="1=0,14000, 10=0,05800, 50=0,05800, 100=0,04800, 1000=0,02800, 10000=0,02000 (USD)", Radiation Hardening=No, REACH SVHC="No SVHC", RoHS=Yes, RoHS Compliant=Yes, Series=GRM, Stock 1=1169227, Supplier 1=Mouser, Thickness=0.022inch, Voltage Rating=6.3V, Voltage Rating (DC)=6.3V, Width=0.02inch
C10: library part GRM155R71H472JA01J, "Multilayer Ceramic Capacitors MLCC - SMD/SMT", Capacitance=4.7nF, Case Code (Imperial)=0402, Case Code (Metric)=1005, Dielectric=X7R, Manufacturer=Murata, Max Operating Temperature=125°C, Min Operating Temperature=-55°C, Package Quantity=50000, Supplier Part Number 1=81-GRM155R71H472JA1J, Tolerance=5%, Voltage Rating (DC)=50V, Case/Package=0402, Category="Ceramic Capacitors", ComponentLink1Description=http://www.mouser.com/ds/2/281/c02e-2905.pdf?src-supplier=Mouser, ComponentLink1URL=http://www.mouser.com/ds/2/281/c02e-2905.pdf?src-supplier=Mouser, Height=0.5mm, Length=1mm, Manufacturer Part Number=GRM155R71H472JA01J, Packaging="Tape and Reel", Pricing 1="1=0,10000, 10=0,03400, 50=0,03400, 100=0,01500, 1000=0,00900, 10000=0,00600 (USD)", RoHS=Yes, RoHS Compliant=Yes, Stock 1=49652, Supplier 1=Mouser, Termination=SMD/SMT, Thickness=500um, Weight=0.000212oz, Width=0.5mm
C11 C13 C14 C15 C16 C17 C22 C23 C24 C25 C27 C31 C32 C38: library part EMK105BJ105KVHF, "TAIYO YUDEN - EMK105BJ105KVHF - CAPACITOR,CERAMIC,0402,16V,X5R,1 F, 10% ROHS COMPLIANT: YES", Capacitance=1uF, Case Code (Imperial)=0402, Case Code (Metric)=1005, Dielectric=X5R, Manufacturer="Taiyo Yuden", Max Operating Temperature=85°C, Min Operating Temperature=-55°C, Package Quantity=10000, Ratings=AEC-Q200, Supplier Part Number 1=963-EMK105BJ105KVHF, Tolerance=10%, Voltage Rating=16V, Case/Package=0402, Category="Ceramic Capacitors", ComponentLink1Description=http://www.mouser.com/ds/2/396/mlcc11_hq_e-541564.pdf?src-supplier=Mouser, ComponentLink1URL=http://www.mouser.com/ds/2/396/mlcc11_hq_e-541564.pdf?src-supplier=Mouser, ComponentLink2Description=http://www.yuden.co.jp/eu/product/category/capacitor/putpdf/EMK105BJ105KVHF.pdf?src-supplier=Avnet, ComponentLink2URL=http://www.yuden.co.jp/eu/product/category/capacitor/putpdf/EMK105BJ105KVHF.pdf?src-supplier=Avnet, ComponentLink3Description=https://www.yuden.co.jp/productdata/catalog/mlcc01_hq_e.pdf?src-supplier=Digi-Key, ComponentLink3URL=https://www.yuden.co.jp/productdata/catalog/mlcc01_hq_e.pdf?src-supplier=Digi-Key, ComponentLink4Description=http://ds.yuden.co.jp/TYCOMPAS/ut/detail.do?productNo=EMK105BJ105KVHF&fileName=EMK105BJ105KVHF_SS&mode=specSheetDownload&src-supplier=Digi-Key, ComponentLink4URL=http://ds.yuden.co.jp/TYCOMPAS/ut/detail.do?productNo=EMK105BJ105KVHF&fileName=EMK105BJ105KVHF_SS&mode=specSheetDownload&src-supplier=Digi-Key, ComponentLink5Description=http://www.farnell.com/datasheets/2819903.pdf?src-supplier=Newark, ComponentLink5URL=http://www.farnell.com/datasheets/2819903.pdf?src-supplier=Newark, Halogen Free="Halogen Free", Height=0.5mm, Lead Free="Lead Free", Length=0.039inch, Manufacturer Part Number=EMK105BJ105KVHF, Mount="Surface Mount", Packaging="Tape and Reel", Pricing 1="1=0,10000, 10=0,06700, 50=0,06700, 100=0,02900, 1000=0,01500, 10000=0,01100 (USD)", RoHS=Yes, RoHS Compliant=Yes, Stock 1=62407, Supplier 1=Mouser, Termination=SMD/SMT, Thickness=0.022inch, Voltage Rating (DC)=16V, Weight=2.3E-05oz, Width=0.5mm
C12: library part TMK105CBJ225KV-F, "Multilayer Ceramic Capacitor 2.2uF 25V 10% 0402 Paper T/R", Manufacturer="Taiyo Yuden", Supplier Part Number 1=963-TMK105CBJ225KV-F, Category="Ceramic Capacitors", ComponentLink1Description=http://www.farnell.com/datasheets/2801310.pdf?src-supplier=Farnell, ComponentLink1URL=http://www.farnell.com/datasheets/2801310.pdf?src-supplier=Farnell, ComponentLink2Description=http://www.farnell.com/datasheets/2801310.pdf?src-supplier=Newark, ComponentLink2URL=http://www.farnell.com/datasheets/2801310.pdf?src-supplier=Newark, ComponentLink3Description=http://www.farnell.com/datasheets/2801310.pdf?src-supplier=Element14, ComponentLink3URL=http://www.farnell.com/datasheets/2801310.pdf?src-supplier=Element14, ComponentLink4Description="https://ds.yuden.co.jp/TYCOMPAS/ut/detail?pn=TMK105CBJ225KV-F &amp;u=M&src-supplier=Digi-Key", ComponentLink4URL="https://ds.yuden.co.jp/TYCOMPAS/ut/detail?pn=TMK105CBJ225KV-F &amp;u=M&src-supplier=Digi-Key", Lead Free="Lead Free", Manufacturer Part Number=TMK105CBJ225KV-F, Pricing 1="1=0,24000, 10=0,09800, 50=0,09800, 100=0,06700, 1000=0,05000, 10000=0,03600 (USD)", RoHS=Yes, RoHS Compliant=Yes, Stock 1=6971, Supplier 1=Mouser
C18 C19: library part GCM1555C1H8R0FA16D, "Cap Ceramic 8pF 50V C0G 1% SMD 0402 125C Paper T/R", Capacitance=8pF, Case/Package=0402, Dielectric=C0G, Manufacturer=Murata, Max Operating Temperature=125°C, Min Operating Temperature=-55°C, Supplier Part Number 1=81-GCM1555C1H8R0FA6D, Tolerance=1%, Category="Ceramic Capacitors", ComponentLink1Description=http://components.arrow.com/part/dataview/0323_07106307?src-supplier=Arrow+Europe, ComponentLink1URL=http://components.arrow.com/part/dataview/0323_07106307?src-supplier=Arrow+Europe, Depth=0.5mm, Length=1mm, Manufacturer Part Number=GCM1555C1H8R0FA16D, Packaging="Tape and Reel", Pricing 1="1=0,13000, 10=0,10100, 50=0,10100, 100=0,04700, 1000=0,02700, 10000=0,01900 (USD)", RoHS=Yes, RoHS Compliant=Yes, Stock 1=10967, Supplier 1=Mouser
C21: library part C1608X5R1A106K080AC, "TDK         C1608X5R1A106K080AC.            CERAMIC CAPACITOR, 10UF, 10V, X5R, 10%, 0603, FULL REEL", Capacitance=10uF, Case Code (Imperial)=0603, Case Code (Metric)=1608, Dielectric=X5R, Dielectric Material=Ceramic, Manufacturer=TDK, Max Operating Temperature=85°C, Min Operating Temperature=-55°C, Package Quantity=1, Supplier Part Number 1=810-C1608X5R1A106K, Tolerance=10%, Voltage=10V, Case/Package=0603, Category="Ceramic Capacitors", ComponentLink1Description=https://datasheet.ciiva.com/16449/mlcc-commercial-general-en-16449573.pdf?src-supplier=Future+Electronics, ComponentLink1URL=https://datasheet.ciiva.com/16449/mlcc-commercial-general-en-16449573.pdf?src-supplier=Future+Electronics, ComponentLink2Description=https://datasheet.ciiva.com/48671/e412-c-48671301.pdf?src-supplier=Avnet, ComponentLink2URL=https://datasheet.ciiva.com/48671/e412-c-48671301.pdf?src-supplier=Avnet, ComponentLink3Description=https://datasheet.ciiva.com/22694/1796654-22694118.pdf?src-supplier=Element14, ComponentLink3URL=https://datasheet.ciiva.com/22694/1796654-22694118.pdf?src-supplier=Element14, ComponentLink4Description=https://datasheet.ciiva.com/17487/e412-c-17487511.pdf?src-supplier=Avnet+Europe, ComponentLink4URL=https://datasheet.ciiva.com/17487/e412-c-17487511.pdf?src-supplier=Avnet+Europe, ComponentLink5Description=https://datasheet.ciiva.com/7975/1796654-7975065.pdf?src-supplier=Element14, ComponentLink5URL=https://datasheet.ciiva.com/7975/1796654-7975065.pdf?src-supplier=Element14, ComponentLink6Description=https://datasheet.ciiva.com/23802/1796654-23802763.pdf?src-supplier=Newark, ComponentLink6URL=https://datasheet.ciiva.com/23802/1796654-23802763.pdf?src-supplier=Newark, ComponentLink7Description=https://datasheet.ciiva.com/6288/tdkmlcccaprange-6288220.pdf?src-supplier=Digi-Key, ComponentLink7URL=https://datasheet.ciiva.com/6288/tdkmlcccaprange-6288220.pdf?src-supplier=Digi-Key, ComponentLink8Description=https://datasheet.ciiva.com/28577/mlcc-commercial-general-en-28577085.pdf?src-supplier=Element14, ComponentLink8URL=https://datasheet.ciiva.com/28577/mlcc-commercial-general-en-28577085.pdf?src-supplier=Element14, ComponentLink9Description=https://datasheet.ciiva.com/6288/tdkmlcccaprange-6288222.pdf?src-supplier=Digi-Key, ComponentLink9URL=https://datasheet.ciiva.com/6288/tdkmlcccaprange-6288222.pdf?src-supplier=Digi-Key, ComponentLink10Description=https://datasheet.ciiva.com/6288/tdkmlcccaprange-6288223.pdf?src-supplier=Digi-Key, ComponentLink10URL=https://datasheet.ciiva.com/6288/tdkmlcccaprange-6288223.pdf?src-supplier=Digi-Key, ComponentLink11Description=https://datasheet.ciiva.com/28577/1744655-28577071.pdf?src-supplier=Element14, ComponentLink11URL=https://datasheet.ciiva.com/28577/1744655-28577071.pdf?src-supplier=Element14, Construction=Flat, Depth=0.8mm, Height=0.8mm, Lead Free="Lead Free", Length=1.6mm, Manufacturer Part Number=C1608X5R1A106K080AC, Mount="Surface Mount", Number of Pins=2, Packaging="Tape and Reel", Pricing 1="1=0,33000, 10=0,21300, 50=0,21300, 100=0,17800, 1000=0,11600, 10000=0,11600 (USD)", Radiation Hardening=No, REACH SVHC="No SVHC", Resistor Type=Ceramic, RoHS=Yes, RoHS Compliant=Yes, Series=C, Stock 1=428553, Supplier 1=Mouser, Termination=SMD/SMT, Thickness=0.035inch, Voltage Rating=10V, Voltage Rating (DC)=10V, Weight=7.1E-05oz, Width=0.8mm
C28 C30: library part 04025A100JAT2A, "AVX - 04025A100JAT2A - SMD Multilayer Ceramic Capacitor, 10 pF, 50 V, 0402 [1005 Metric], ± 5%, C0G / NP0, AVX 0402 MLCC", Capacitance=10pF, Case Code (Imperial)=0402, Case Code (Metric)=1005, Dielectric=C0G, Dielectric Material=Ceramic, Manufacturer="Kyocera AVX", Max Operating Temperature=125°C, Min Operating Temperature=-55°C, Package Quantity=1, Supplier Part Number 1=581-04025A100J, Temperature Coefficient=0ppm/°C, Tolerance=5%, Voltage=50V, Case/Package=0402, Category="Ceramic Capacitors", ComponentLink1Description=https://datasheet.ciiva.com/150/ccog-150503.pdf?src-supplier=Digi-Key, ComponentLink1URL=https://datasheet.ciiva.com/150/ccog-150503.pdf?src-supplier=Digi-Key, ComponentLink2Description=https://datasheet.ciiva.com/150/ccog-150504.pdf?src-supplier=Digi-Key, ComponentLink2URL=https://datasheet.ciiva.com/150/ccog-150504.pdf?src-supplier=Digi-Key, ComponentLink3Description=https://datasheet.ciiva.com/2987/ccog-2987640.pdf?src-supplier=Avnet, ComponentLink3URL=https://datasheet.ciiva.com/2987/ccog-2987640.pdf?src-supplier=Avnet, ComponentLink4Description=https://datasheet.ciiva.com/150/ccog-150505.pdf?src-supplier=Digi-Key, ComponentLink4URL=https://datasheet.ciiva.com/150/ccog-150505.pdf?src-supplier=Digi-Key, ComponentLink5Description=https://datasheet.ciiva.com/16389/ccog-16389833.pdf?src-supplier=Future+Electronics, ComponentLink5URL=https://datasheet.ciiva.com/16389/ccog-16389833.pdf?src-supplier=Future+Electronics, ComponentLink6Description=https://datasheet.ciiva.com/7709/759117-7709531.pdf?src-supplier=Element14, ComponentLink6URL=https://datasheet.ciiva.com/7709/759117-7709531.pdf?src-supplier=Element14, ComponentLink7Description=https://datasheet.ciiva.com/7709/84496-7709756.pdf?src-supplier=Element14, ComponentLink7URL=https://datasheet.ciiva.com/7709/84496-7709756.pdf?src-supplier=Element14, ComponentLink8Description=https://datasheet.ciiva.com/16465/ccog-16465757.pdf?src-supplier=Avnet+Asia, ComponentLink8URL=https://datasheet.ciiva.com/16465/ccog-16465757.pdf?src-supplier=Avnet+Asia, ComponentLink9Description=https://datasheet.ciiva.com/1123/425357-1123470.pdf?src-supplier=Element14, ComponentLink9URL=https://datasheet.ciiva.com/1123/425357-1123470.pdf?src-supplier=Element14, ComponentLink10Description=https://datasheet.ciiva.com/1123/425357-1123471.pdf?src-supplier=Element14, ComponentLink10URL=https://datasheet.ciiva.com/1123/425357-1123471.pdf?src-supplier=Element14, Construction=Flat, Contact Plating=Tin,Matte, Depth=0.5mm, Height=0.5mm, Lead Free="Lead Free", Length=1mm, Manufacturer Part Number=04025A100JAT2A, Mount="Surface Mount,PCB", Number of Pins=2, Packaging="Tape and Reel", Pricing 1="1=0,08000, 10=0,01700, 50=0,01700, 100=0,01400, 1000=0,00800, 10000=0,00500 (USD)", Radiation Hardening=No, REACH SVHC="No SVHC", RoHS=Yes, RoHS Compliant=Yes, Series=-, Stock 1=243212, Supplier 1=Mouser, Termination=SMD/SMT, Thickness=0.022inch, Voltage Rating=50V, Voltage Rating (DC)=50V, Width=0.5mm
C29: library part GRM155R60J106ME05J, "Multi-Layer Ceramic Capacitor 10uF X5R 20% 0402 Paper T/R", Manufacturer=Murata, Supplier Part Number 1=81-GRM155R60J106ME05, Category="Ceramic Capacitors", Manufacturer Part Number=GRM155R60J106ME05J, Pricing 1="1=0,15000, 10=0,11100, 50=0,11100, 100=0,05200, 1000=0,03000, 10000=0,02100 (USD)", RoHS=Yes, Supplier 1=Mouser
C33 C34: library part CC0402KRX7R9BB561, "CAP CER 560PF 50V X7R 0402", Capacitance=560pF, Case Code (Imperial)=0402, Case Code (Metric)=1005, Dielectric=X7R, Manufacturer=Yageo, Max Operating Temperature=125°C, Min Operating Temperature=-55°C, Package Quantity=1, Resistor Type=Ceramic, Supplier Part Number 1=603-CC402KRX7R9BB561, Tolerance=10%, Voltage Rating=50V, Case/Package=0402, Category="Ceramic Capacitors", ComponentLink1Description=https://datasheet.ciiva.com/155/mlccorderingcode-155860.pdf?src-supplier=Digi-Key, ComponentLink1URL=https://datasheet.ciiva.com/155/mlccorderingcode-155860.pdf?src-supplier=Digi-Key, ComponentLink2Description=https://datasheet.ciiva.com/155/mlccorderingcode-155861.pdf?src-supplier=Digi-Key, ComponentLink2URL=https://datasheet.ciiva.com/155/mlccorderingcode-155861.pdf?src-supplier=Digi-Key, ComponentLink3Description=https://datasheet.ciiva.com/155/mlccorderingcode-155862.pdf?src-supplier=Digi-Key, ComponentLink3URL=https://datasheet.ciiva.com/155/mlccorderingcode-155862.pdf?src-supplier=Digi-Key, ComponentLink4Description=https://datasheet.ciiva.com/17437/upy-gphc-x7r-6-3v-to-50v-8-17437195.pdf?src-supplier=Avnet+Europe, ComponentLink4URL=https://datasheet.ciiva.com/17437/upy-gphc-x7r-6-3v-to-50v-8-17437195.pdf?src-supplier=Avnet+Europe, ComponentLink5Description=https://datasheet.ciiva.com/11586/upy-gphc-x7r-6-3v-to-50v-8-11586492.pdf?src-supplier=Avnet, ComponentLink5URL=https://datasheet.ciiva.com/11586/upy-gphc-x7r-6-3v-to-50v-8-11586492.pdf?src-supplier=Avnet, ComponentLink6Description=https://datasheet.ciiva.com/13395/upy-gphc-x7r-6-3v-to-50v-8-13395197.pdf?src-supplier=Mouser, ComponentLink6URL=https://datasheet.ciiva.com/13395/upy-gphc-x7r-6-3v-to-50v-8-13395197.pdf?src-supplier=Mouser, Construction=Flat, Depth=0.5mm, Halogen Free="Halogen Free", Height=0.5mm, Lead Free="Lead Free", Length=1mm, Manufacturer Part Number=CC0402KRX7R9BB561, Mount="Surface Mount", Number of Pins=2, Packaging="Tape and Reel", Pricing 1="1=0,10000, 10=0,02400, 50=0,02400, 100=0,01100, 1000=0,00900, 10000=0,00600 (USD)", Radiation Hardening=No, RoHS=Yes, RoHS Compliant=Yes, Series=CC, Stock 1=95508, Supplier 1=Mouser, Termination=SMD/SMT, Thickness=0.022inch, Voltage Rating (DC)=50V, Width=0.02inch
D1: library part BAT54CLT1G, "Diode Schottky 30V 0.2A 3-Pin SOT-23 T/R", Average Rectified Current=200mA, Capacitance=10pF, Case/Package=SOT-23-3, Forward Voltage=800mV, Manufacturer="ON Semiconductor", Max Forward Surge Current (Ifsm)=600mA, Max Operating Temperature=125°C, Max Power Dissipation=225mW, Max Repetitive Reverse Voltage (Vrrm)=30V, Max Reverse Current=2uA, Min Operating Temperature=-55°C, Package Quantity=3000, Supplier Part Number 1=863-BAT54CLT1G, Category="Schottky Diodes", ComponentLink1Description=https://datasheet.ciiva.com/1240/bat54clt1-d-1240707.pdf?src-supplier=Newark, ComponentLink1URL=https://datasheet.ciiva.com/1240/bat54clt1-d-1240707.pdf?src-supplier=Newark, ComponentLink2Description=https://datasheet.ciiva.com/34301/885769-34301654.pdf?src-supplier=Jameco, ComponentLink2URL=https://datasheet.ciiva.com/34301/885769-34301654.pdf?src-supplier=Jameco, ComponentLink3Description=https://datasheet.ciiva.com/30479/0900766b8121b932-30479128.pdf?src-supplier=RSComponents, ComponentLink3URL=https://datasheet.ciiva.com/30479/0900766b8121b932-30479128.pdf?src-supplier=RSComponents, ComponentLink4Description=https://datasheet.ciiva.com/15144/getdatasheetpartid-98336-15144809.pdf?src-supplier=Verical, ComponentLink4URL=https://datasheet.ciiva.com/15144/getdatasheetpartid-98336-15144809.pdf?src-supplier=Verical, ComponentLink5Description=https://datasheet.ciiva.com/22659/1918740-22659014.pdf?src-supplier=Element14, ComponentLink5URL=https://datasheet.ciiva.com/22659/1918740-22659014.pdf?src-supplier=Element14, ComponentLink6Description=https://datasheet.ciiva.com/1180/bat54clt1-d-1180247.pdf?src-supplier=Element14, ComponentLink6URL=https://datasheet.ciiva.com/1180/bat54clt1-d-1180247.pdf?src-supplier=Element14, ComponentLink7Description=https://datasheet.ciiva.com/1180/bat54clt1-d-1180248.pdf?src-supplier=Element14, ComponentLink7URL=https://datasheet.ciiva.com/1180/bat54clt1-d-1180248.pdf?src-supplier=Element14, ComponentLink8Description=https://datasheet.ciiva.com/16205/bat54clt1-d-16205033.pdf?src-supplier=Future+Electronics, ComponentLink8URL=https://datasheet.ciiva.com/16205/bat54clt1-d-16205033.pdf?src-supplier=Future+Electronics, ComponentLink9Description=https://datasheet.ciiva.com/905/bat54clt1-d-905835.pdf?src-supplier=Digi-Key, ComponentLink9URL=https://datasheet.ciiva.com/905/bat54clt1-d-905835.pdf?src-supplier=Digi-Key, ComponentLink10Description=https://datasheet.ciiva.com/28655/bat54clt1-d-28655787.pdf?src-supplier=Element14, ComponentLink10URL=https://datasheet.ciiva.com/28655/bat54clt1-d-28655787.pdf?src-supplier=Element14, ComponentLink11Description=https://datasheet.ciiva.com/8294/bat54clt1-d-8294495.pdf?src-supplier=Avnet, ComponentLink11URL=https://datasheet.ciiva.com/8294/bat54clt1-d-8294495.pdf?src-supplier=Avnet, Contact Plating=Tin,Matte, Current Rating=200mA, Element Configuration="Common Cathode", Forward Current=200mA, Halogen Free="Halogen Free", Height=1.01mm, Lead Free="Lead Free", Length=3.04mm, Manufacturer Part Number=BAT54CLT1G, Max Reverse Leakage Current=2uA, Max Reverse Voltage (DC)=30V, Max Surge Current=600mA, Number of Pins=3, Packaging="Tape and Reel", Peak Non-Repetitive Surge Current=600mA, Power Dissipation=225mW, Pricing 1="1=0,14000, 10=0,10500, 50=0,10500, 100=0,04100, 1000=0,02900, 10000=0,02200 (USD)", Radiation Hardening=No, REACH SVHC="No SVHC", Recovery Time=5ns, Reverse Recovery Time=5ns, RoHS=Yes, Stock 1=184659, Supplier 1=Mouser, Voltage Rating (DC)=30V, Width=1.4mm